# EAGLE board KKK_valdiklis1 (EAGLE 6.4)

Size 100 x 87 mm. Coordinates in mm from the lower left corner, seen from the top.
Outline: 0,87 100,87 100,0 0,0 0,87
Copper layers (1*16): Top 0.035mm / dielectric 1.5mm / Bottom 0.035mm
Design rules "SparkFun_Iteadstudio_10mil": minimum track width 10mil, minimum drill 20mil, track to track 10mil, track to pad 10mil, pad to pad 10mil, via to via 10mil, smd to smd 10mil, copper to edge 0.5mm, drill to drill 8mil, minimum pad ring 12mil, minimum via ring 10mil, stop-mask expansion 4mil, vias tented up to drill 25mil, thermal gap 10mil
Net classes: 0 default: width 0.5 mm; 1 power: width 0.61 mm, clearance 0.203 mm; 3 antenna: width 0.61 mm; 5 220v: width 1 mm

## Footprints (pad centres in the part's own frame; a part is rotated, then mirrored left to right if it is on the bottom)
BATTCOM_20MM_PTH = drill 1.3: 1 20,0; 2 0,0
CAP-PTH-5MM = drill 0.7 pad 1.651: 1 -2.5,0; 2 2.5,0
CAP-PTH-SMALL = drill 0.7 pad 1.651: 1 0,0; 2 2.54,0
CPOL-RADIAL-10UF-25V = drill 0.7 pad 1.651 square: 1 1.27,0 | drill 0.7 pad 1.651: 2 -1.27,0
C0805K = smd 1.3 x 1.6: 1 -1,0; 2 1,0
DIODE-TH-0.4 = drill 1 pad 1.981: A -5.08,0; C 5.08,0
DO41-10 = drill 1.118: A 5.08,0; C -5.08,0
SOT223 = smd 1.499 x 2.007: 1 -2.261,-3.15; 2 0.025,-3.15; 3 2.311,-3.15 | smd 3.81 x 2.007: 4 0,3.15
DIL16 = drill 0.813 long: 1 -8.89,-3.81; 2 -6.35,-3.81; 3 -3.81,-3.81; 4 -1.27,-3.81; 5 1.27,-3.81; 6 3.81,-3.81; 7 6.35,-3.81; 8 8.89,-3.81; 9 8.89,3.81; 10 6.35,3.81; 11 3.81,3.81; 12 1.27,3.81; 13 -1.27,3.81; 14 -3.81,3.81; 15 -6.35,3.81; 16 -8.89,3.81
DIL40 = drill 0.813 long: 1 -24.13,-7.62; 2 -21.59,-7.62; 3 -19.05,-7.62; 4 -16.51,-7.62; 5 -13.97,-7.62; 6 -11.43,-7.62; 7 -8.89,-7.62; 8 -6.35,-7.62; 9 -3.81,-7.62; 10 -1.27,-7.62; 11 1.27,-7.62; 12 3.81,-7.62; 13 6.35,-7.62; 14 8.89,-7.62; 15 11.43,-7.62; 16 13.97,-7.62; 17 16.51,-7.62; 18 19.05,-7.62; 19 21.59,-7.62; 20 24.13,-7.62; 21 24.13,7.62; 22 21.59,7.62; 23 19.05,7.62; 24 16.51,7.62; 25 13.97,7.62; 26 11.43,7.62; 27 8.89,7.62; 28 6.35,7.62; 29 3.81,7.62; 30 1.27,7.62; 31 -1.27,7.62; 32 -3.81,7.62; 33 -6.35,7.62; 34 -8.89,7.62; 35 -11.43,7.62; 36 -13.97,7.62; 37 -16.51,7.62; 38 -19.05,7.62; 39 -21.59,7.62; 40 -24.13,7.62
DIL08 = drill 0.813 long: 1 -3.81,-3.81; 2 -1.27,-3.81; 3 1.27,-3.81; 4 3.81,-3.81; 5 3.81,3.81; 6 1.27,3.81; 7 -1.27,3.81; 8 -3.81,3.81
1X03 = drill 1.016 pad 1.88: 1 0,0; 2 2.54,0; 3 5.08,0
1X02 = drill 1.016 pad 1.88: 1 0,0; 2 2.54,0
S202T02 = drill 1 pad 2: A 10.16,0; DS1 -5.08,0; DS2 0,0; K 12.7,0
RES-AXIAL-0.4 = drill 0.9 pad 1.88: P$1 -5.08,0; P$2 5.08,0
LED3MM = drill 0.813 pad 1.88: A -1.27,0; K 1.27,0
TO-92 = drill 0.813 pad 1.88: 1 -1.27,0; 2 0,1.905; 3 1.27,0
TO220AV = drill 1.016 long: B -2.54,-2.54; C 0,-2.54; E 2.54,-2.54
TC38H = drill 0.813: 1 -1.27,0; 2 1.27,0
0207/10 = drill 0.813 pad 1.93 octagon: 1 -5.08,0; 2 5.08,0
0207/10' = drill 0.813 octagon: 1 -5.08,0; 2 5.08,0
0207/10'' = drill 0.813 pad 1.676 octagon: 1 -5.08,0; 2 5.08,0
TACTILE-PTH = drill 1.016 pad 1.88: 1 -3.251,2.261; 2 3.251,2.261; 3 -3.251,-2.261; 4 3.251,-2.261
B3F-10XX = drill 1.016 long: 1 -3.251,2.261; 2 3.251,2.261; 3 -3.251,-2.261; 4 3.251,-2.261
1.8"_TFT = drill 1 pad 1.778: P$3 55.5,21.05; P$4 55.5,18.52; P$5 55.5,15.98; P$6 55.5,13.44; P$9 2.5,26.14; P$10 2.5,23.6; P$11 2.5,21.06; P$12 2.5,18.52; P$13 2.5,15.98; P$14 2.5,13.44; P$15 2.5,10.9; P$16 2.5,8.36
SO016 = smd 0.6 x 1.2: 1 -4.445,-2.8; 2 -3.175,-2.8; 3 -1.905,-2.8; 4 -0.635,-2.8; 5 0.635,-2.8; 6 1.905,-2.8; 7 3.175,-2.8; 8 4.445,-2.8; 9 4.445,2.8; 10 3.175,2.8; 11 1.905,2.8; 12 0.635,2.8; 13 -0.635,2.8; 14 -1.905,2.8; 15 -3.175,2.8; 16 -4.445,2.8
USB-MINIB-THM-MOLEX = drill 0.7 offset: D+ 0,9.72; D- -0.8,8.42; GND 1.6,9.72; ID 0.8,8.42; VBUS -1.6,9.72 | drill 2 pad 3.81: GND1 -3.65,4.57; GND4 3.65,4.57
22-23-2041 = drill 1 long: 1 -3.81,0; 2 -1.27,0; 3 1.27,0; 4 3.81,0
3POL254 = drill 1.2: 1 -2.54,0; 2 0,0; 3 2.54,0
RESONATOR-PTH = drill 0.8 pad 1.88: 1 -2.54,0; 2 0,0; 3 2.54,0
HC49U-V-RESONATOR = drill 0.813 pad 1.88: 1 -2.54,0; 2 2.54,0; GND 0,0

## Placement (x,y rotation side)
BAT1  CR2032  [BATTCOM_20MM_PTH]  96.52,53.34 180 top
C1  1u  [CAP-PTH-5MM]  40.64,25.08 0 top
C2  1u  [CAP-PTH-5MM]  38.1,39.37 0 top
C3  100n  [CAP-PTH-SMALL]  -40.64,0 0 top  (outside the outline)
C5  100n  [CAP-PTH-SMALL]  33.02,39.37 180 top
C6  4u7  [CPOL-RADIAL-10UF-25V]  13.97,38.1 0 top
C7  100n  [CAP-PTH-SMALL]  33.02,62.87 180 top
C8  1u  [CAP-PTH-5MM]  48.26,25.08 180 top
C9  100n  [CAP-PTH-SMALL]  27.94,41.91 0 top
C10  22p  [CAP-PTH-SMALL]  25.4,62.87 0 top
C11  22p  [CAP-PTH-SMALL]  20.32,62.87 0 top
C13  100n  [CAP-PTH-SMALL]  -40.64,5.08 0 top  (outside the outline)
C17  0.1uF  [C0805K]  -29.21,17.78 0 top  (outside the outline)
D1  BAT85  [DIODE-TH-0.4]  69.85,60.96 270 top
D3  1N4004  [DO41-10]  50.8,-15.24 90 top  (outside the outline)
D4  1N4004  [DO41-10]  99.06,-15.24 90 top  (outside the outline)
IC1  MCP1702-3.3  [SOT223]  38.1,35.56 180 top
IC2  L293D  [DIL16]  -29.84,-102.23 0 top  (outside the outline)
IC3  MCP1702-5.0  [SOT223]  22.86,34.29 180 top
IC4  ATMEGA1284  [DIL40]  29.21,52.07 180 top
IC5  DS1307  [DIL08]  128.27,-13.97 90 top  (outside the outline)
JP5  3V3/5V  [1X03]  50.8,15.24 90 top
JP6  VREG PWR  [1X02]  20.32,27.94 0 top
K1  S202T02  [S202T02]  -33.66,-41.27 0 top  (outside the outline)
K2  S202T02  [S202T02]  -33.66,-53.98 0 top  (outside the outline)
K3  S202T02  [S202T02]  -33.66,-64.14 0 top  (outside the outline)
K4  S202T02  [S202T02]  -33.66,-75.56 0 top  (outside the outline)
K5  S202T02  [S202T02]  -33.66,-87 0 top  (outside the outline)
K7  S202T02  [S202T02]  -33.66,-29.84 0 top  (outside the outline)
L1  10uH  [RES-AXIAL-0.4]  22.86,38.1 180 top
LED1  D13  [LED3MM]  3.81,22.86 270 top
LED2  PWR  [LED3MM]  3.81,17.78 270 top
Q1  2N7000  [TO-92]  6.35,38.1 180 top
Q2  TIP120V  [TO220AV]  26.67,-15.24 90 top  (outside the outline)
Q3  TIP120V  [TO220AV]  74.93,-15.24 90 top  (outside the outline)
Q4  32.768  [TC38H]  133.35,-5.08 90 top  (outside the outline)
R1  1k  [RES-AXIAL-0.4]  10.16,29.84 0 top
R2  1k  [RES-AXIAL-0.4]  10.16,33.02 0 top
R3  330  [0207/10]  -18.41,-48.26 180 top  (outside the outline)
R4  330  [0207/10]  -19.05,-59.69 180 top  (outside the outline)
R5  330  [0207/10]  -18.41,-35.56 180 top  (outside the outline)
R6  10k  [RES-AXIAL-0.4]  73.03,60.96 270 top
R7  330  [0207/10]  -19.05,-69.22 180 top  (outside the outline)
R8  3k3  [0207/10']  2.54,-15.24 90 top  (outside the outline)
R9  1k  [0207/10']  7.62,-15.24 90 top  (outside the outline)
R10  1M  [RES-AXIAL-0.4]  36.2,67.94 180 top
R11  2k  [0207/10']  -2.54,-15.24 90 top  (outside the outline)
R12  2k  [0207/10']  55.88,-15.24 90 top  (outside the outline)
R13  2k  [0207/10']  104.14,-15.24 90 top  (outside the outline)
R14  2.2K  [0207/10'']  138.43,-1.27 90 top  (outside the outline)
R15  2.2k  [0207/10'']  144.78,-15.24 90 top  (outside the outline)
R16  330  [0207/10]  -19.05,-81.28 180 top  (outside the outline)
R17  330  [0207/10]  -18.41,-93.34 180 top  (outside the outline)
S1  RESET  [TACTILE-PTH]  33.66,5.08 0 top
S2  [B3F-10XX]  -25.4,-15.24 90 top  (outside the outline)
S3  [B3F-10XX]  -16.51,-15.24 90 top  (outside the outline)
S4  [B3F-10XX]  -7.62,-15.24 90 top  (outside the outline)
U$1  1.8"_TFT  [1.8"_TFT]  0.64,91.44 0 top  (outside the outline)
U$2  CH340G  [SO016]  -36.83,16.51 0 top  (outside the outline)
USB  [USB-MINIB-THM-MOLEX]  -35.56,22.86 0 top  (outside the outline)
X1  PUMP  [22-23-2041]  88.9,-15.24 90 top  (outside the outline)
X4  PUMP  [22-23-2041]  40.64,-15.24 90 top  (outside the outline)
X10  [3POL254]  130.18,19.05 0 top  (outside the outline)
Y1  12mhz  [RESONATOR-PTH]  -38.1,10.16 0 top  (outside the outline)
Y2  16MHz  [HC49U-V-RESONATOR]  22.86,66.67 180 top

## Library data of the parts
BAT1 C1-C3 C5-C9 C13 JP5 JP6 LED1 LED2 S1 = SparkFun
C10 C11 = SparkFun; OPTION: Do not fit for ceramic resonator
C17 = rcl
D1 L1 Q1 R1 R2 R6 R10 = SteveMarple
D3 D4 = diode
IC1 IC3 = burr-brown; MPN: REG1117; OC_FARNELL: 1097566; OC_NEWARK: 14P6981
IC2 = st-microelectronics; MPN: L293D; OC_FARNELL: 9589619; OC_NEWARK: 56P8249
IC4 = SteveMarple; MPN: ATMEGA644-20PU; OC_FARNELL: 1288340; OC_NEWARK: 23M5060
IC5 R14 R15 USB = adafruit
K1-K5 K7 = relay-1
Q2 Q3 = rocketfarm
Q4 = crystal
R3-R5 R7 R16 R17 = resistor-1
R8 R9 R11-R13 = resistor
S2-S4 = switch-omron; MPN: B3F-1000; OC_FARNELL: 176432; OC_NEWARK: 36M3542
U$1 = tft_1.8_1.44_oled_0.96
U$2 = ch340
X1 X4 = con-molex; MF: MOLEX; MPN: 22-23-2041; OC_FARNELL: 1462920; OC_NEWARK: 38C0355
X10 = con-phoenix-254; OC_FARNELL: unknown; OC_NEWARK: unknown
Y1 = SparkFun-FreqCtrl
Y2 = SteveMarple; OPTION: Crystal or ceramic resonator. Max 12MHz for 3V3 operation.

## Nets
0(RX0): U$2.2
1(TX0): U$2.3
13(SCK): Q1.2 R10.P$2
20(SDA): IC5.5 R15.1
21(SCL): IC5.6 R14.2
!RESET: C17.2 D1.A IC4.9 R6.P$1 S1.3 S1.4
+3V3 [power]: C2.1 IC1.2 JP5.1
+5V [power]: C1.1 IC1.3 JP5.3 JP6.2 U$2.16 USB.VBUS X10.3
A0: IC4.40 R9.2 R11.1 S2.1 S2.2
A1: IC4.39
A2: IC4.38
A3: IC4.37
A4: IC4.36
A5: IC4.35
A6: IC4.34
A7: IC4.33
AREF: C5.1 IC4.32
AVCC [power]: C9.1 IC4.30 L1.P$1
D0: IC4.1 R5.1
D1: IC4.2 R17.1
D2: IC4.3 R16.1 X10.2
D3: IC4.4 R7.1 R12.1 R13.1
D4: IC4.5 R4.1
D5: R3.1
D5(MOSI): IC4.6
D6(MISO): IC4.7
D7(SCK): IC4.8
D8(RX0): IC4.14
D9(TX0): IC4.15
D11(TX1): IC4.17
D12: IC4.18
D13: IC4.19
D14: IC4.20
D15: IC4.21
D16(SCL): IC4.22
D17(SDA): IC4.23
D18(TCK): IC4.24
D19(TMS): IC4.25
D20(TDO): IC4.26
D21: IC4.27
D22: IC4.28
D23: IC4.29
D102(RX1): IC4.16
GND [power]: BAT1.2 C1.2 C2.2 C3.1 C5.2 C6.2 C7.2 C8.2 C9.2 C10.2 C11.2 C13.2 D3.A IC1.1 IC3.1 IC4.11 IC4.31 IC5.4 K1.K K2.K K3.K K4.K K5.K K7.K LED2.K Q1.1 Q2.E R10.P$1 S1.1 S1.2 S2.3 S2.4 S3.3 S3.4 S4.3 S4.4 U$2.1 USB.GND USB.ID X4.3 X4.4 X10.1 Y1.2 Y2.GND
GND1 [power]: D4.A IC2.4 Q3.E X1.3 X1.4
GND2: IC2.5
GND3: IC2.13
GND4: IC2.12
N$1: C11.1 IC4.13 Y2.2
N$2: C10.1 IC4.12 Y2.1
N$3: LED1.A R1.P$1
N$4: LED1.K Q1.3
N$5: U$2.7 Y1.1
N$6: R8.1 S4.1 S4.2
N$7: C3.2 U$2.4
N$8: LED2.A R2.P$1
N$9: U$2.8 Y1.3
N$10: R8.2 R9.1 S3.1 S3.2
N$11: C17.1 U$2.14
N$12: U$2.6 USB.D-
N$13: Q2.B R12.2
N$14: IC3.2 JP6.1
N$15: D3.C Q2.C X4.1 X4.2
N$16: K1.A R3.2
N$17: Q3.B R13.2
N$18 [220v]: K1.DS1
N$19: D4.C Q3.C X1.1 X1.2
N$20: IC5.1 Q4.2
N$21: IC5.2 Q4.1
N$22: U$2.5 USB.D+
N$23 [220v]: K1.DS2
N$24: K2.A R4.2
N$25 [220v]: K2.DS1
N$26 [220v]: K2.DS2
N$27: BAT1.1 IC5.3
N$28: K7.A R5.2
N$29 [220v]: K7.DS1
N$30 [220v]: K7.DS2
N$31: K3.A R7.2
N$32 [220v]: K3.DS1
N$33 [220v]: K3.DS2
N$34: K4.A R16.2
N$35 [220v]: K4.DS1
N$36 [220v]: K4.DS2
N$37: K5.A R17.2
N$38 [220v]: K5.DS1
N$39 [220v]: K5.DS2
SQW: IC5.7
VCC [power]: C6.1 C7.1 C13.1 D1.C IC4.10 IC5.8 JP5.2 L1.P$2 R1.P$2 R2.P$2 R6.P$2 R11.2 R14.1 R15.2
VCC1: IC2.16
VCC2: IC2.8
VIN [power]: C8.1 IC3.3

## Tracks (layer width: path | path; a pad name or v marks a point on that pad's centre or on a via)
13(SCK)  (1 unrouted)
20(SDA)  (1 unrouted)
21(SCL)  (1 unrouted)
!RESET  (5 unrouted)
+3V3  (2 unrouted)
+5V  (6 unrouted)
A0  (4 unrouted)
AREF  (1 unrouted)
AVCC  (2 unrouted)
D0  (1 unrouted)
D1  (1 unrouted)
D2  (2 unrouted)
D3  (3 unrouted)
D4  (1 unrouted)
GND  (43 unrouted)
GND1  (4 unrouted)
N$1  (2 unrouted)
N$2  (2 unrouted)
N$3  (1 unrouted)
N$4  (1 unrouted)
N$5  (1 unrouted)
N$6  (2 unrouted)
N$7  (1 unrouted)
N$8  (1 unrouted)
N$9  (1 unrouted)
N$10  (3 unrouted)
N$11  (1 unrouted)
N$12  (1 unrouted)
N$13  (1 unrouted)
N$14  (1 unrouted)
N$15  (3 unrouted)
N$16  (1 unrouted)
N$17  (1 unrouted)
N$19  (3 unrouted)
N$20  (1 unrouted)
N$21  (1 unrouted)
N$22  (1 unrouted)
N$24  (1 unrouted)
N$27  (1 unrouted)
N$28  (1 unrouted)
N$31  (1 unrouted)
N$34  (1 unrouted)
N$37  (1 unrouted)
VCC  (13 unrouted)
VIN  (1 unrouted)

## Text on the board
tNames: GREEN | DTR | BLACK | GND | RESET
tValues: MHz
_tsilk: 5V